# Altium PCB ir-kh.PcbDoc
Units mm, origin at the board's own origin, x right, y up, seen from the top; angles counter-clockwise.
Board outline 151 x 86.38 mm, 2 copper layers (Top Layer, Bottom Layer); 24 components, 19 nets, 66 pads, 0 vias.
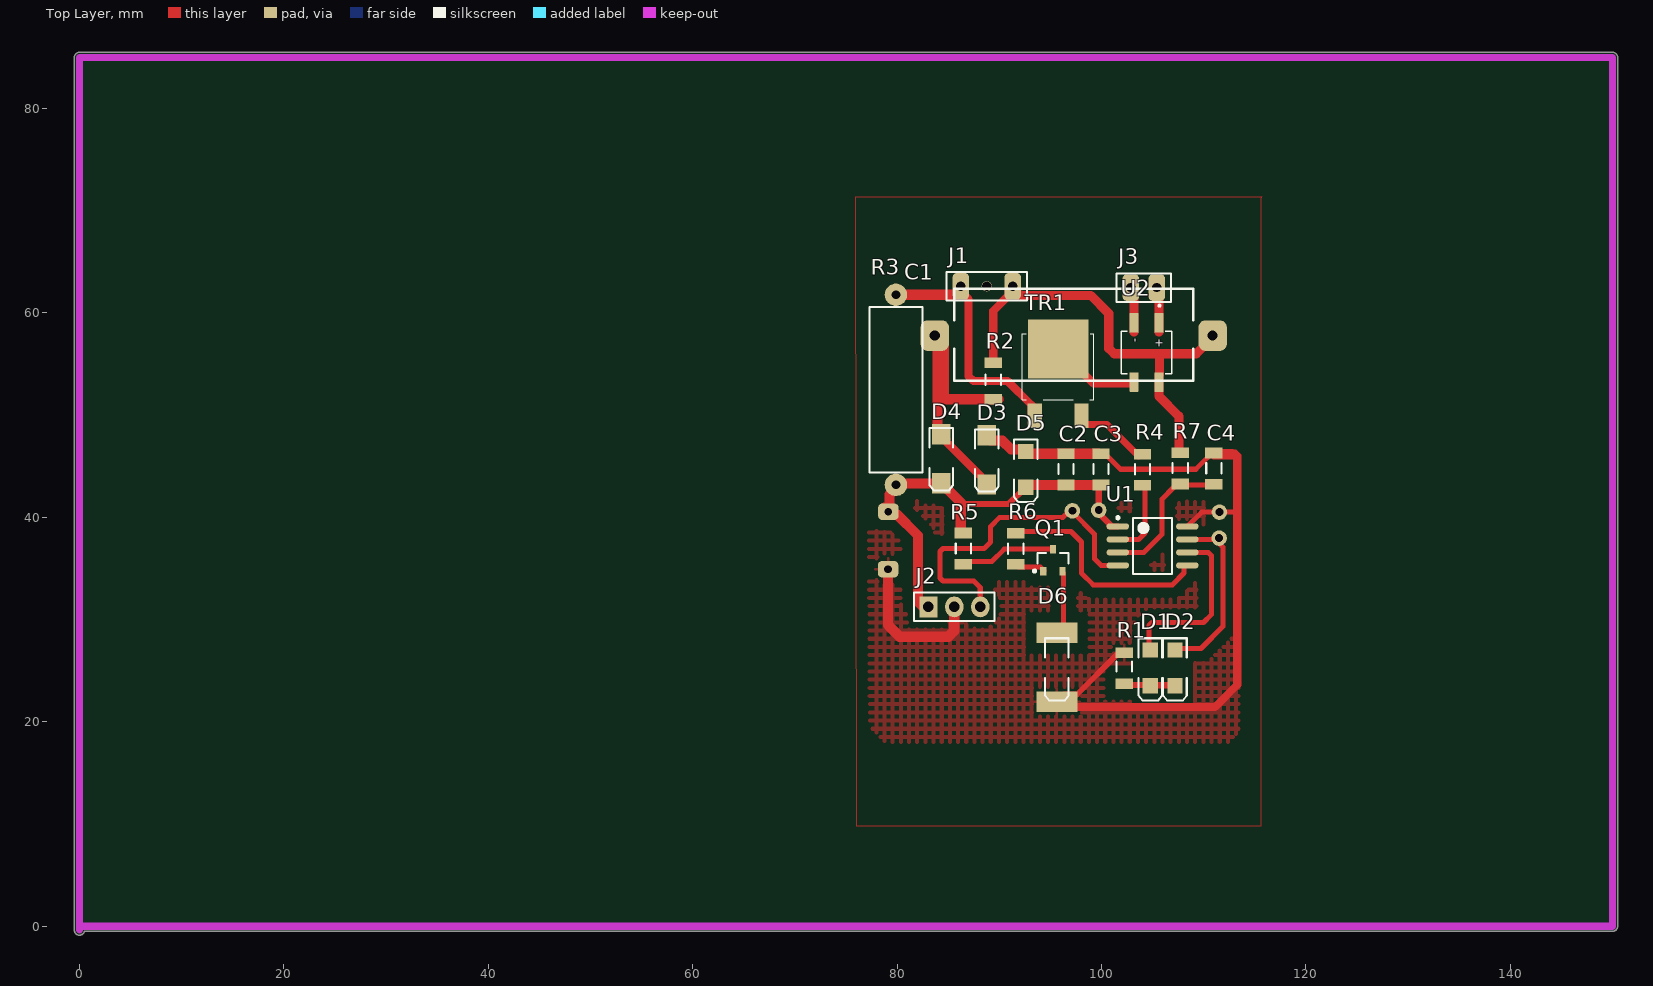
[diagram p0: Top Layer view]
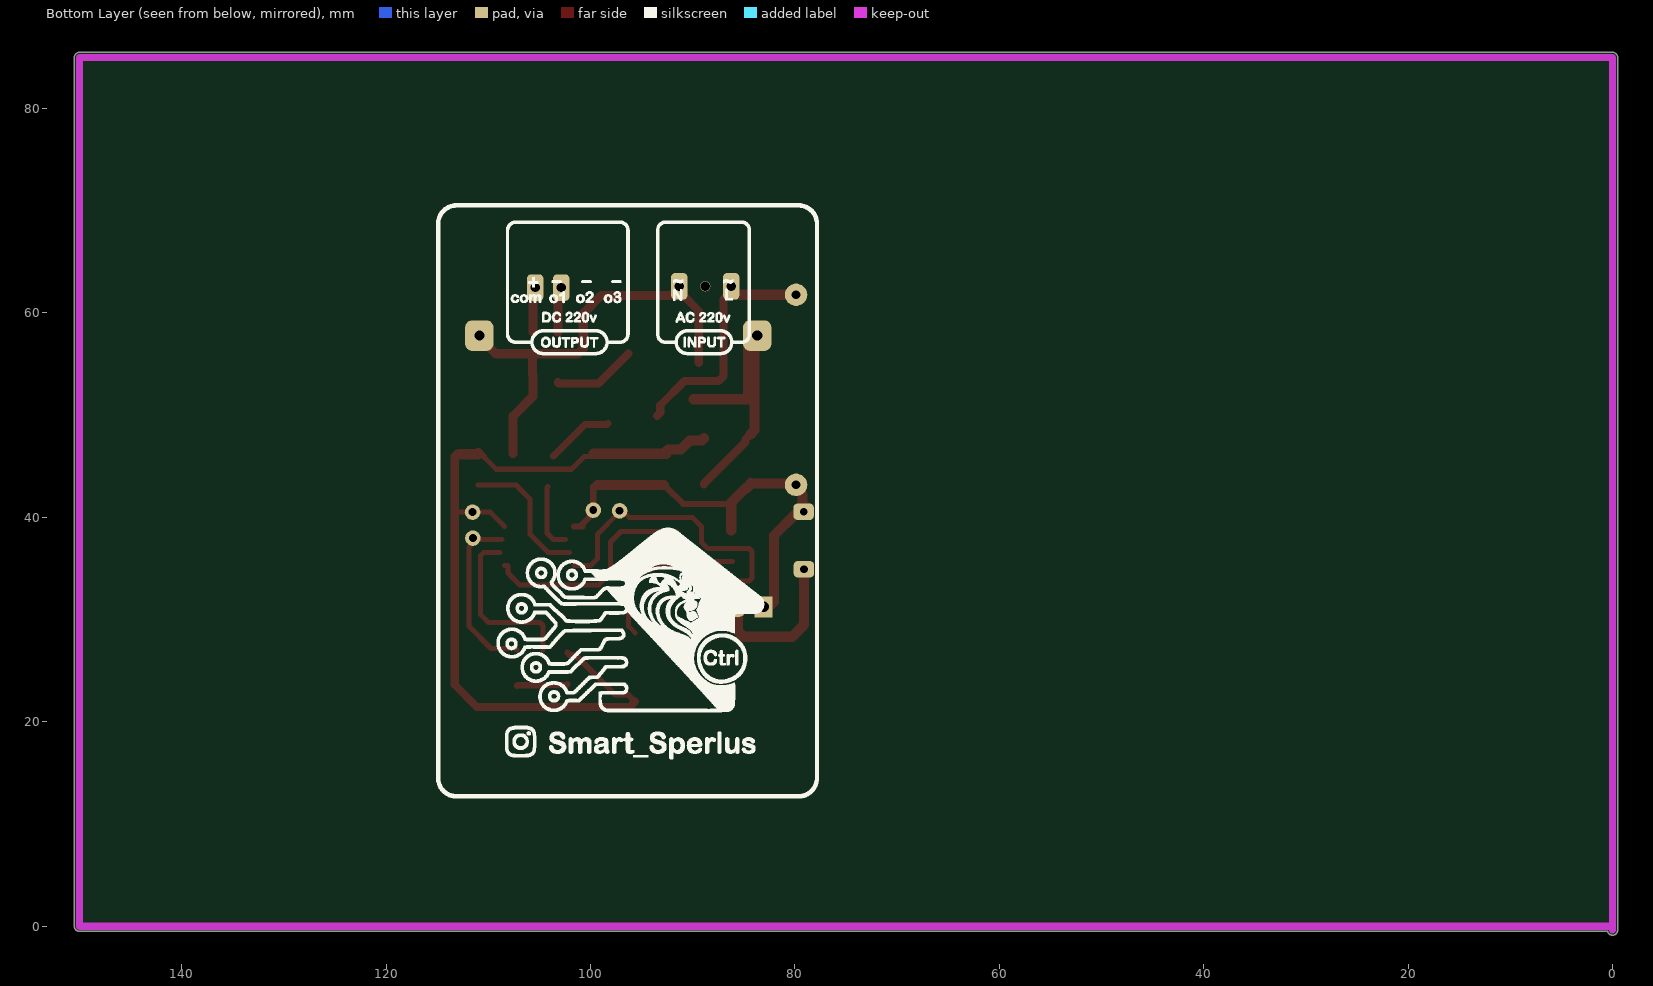
[diagram p1: Bottom Layer view, seen from below]
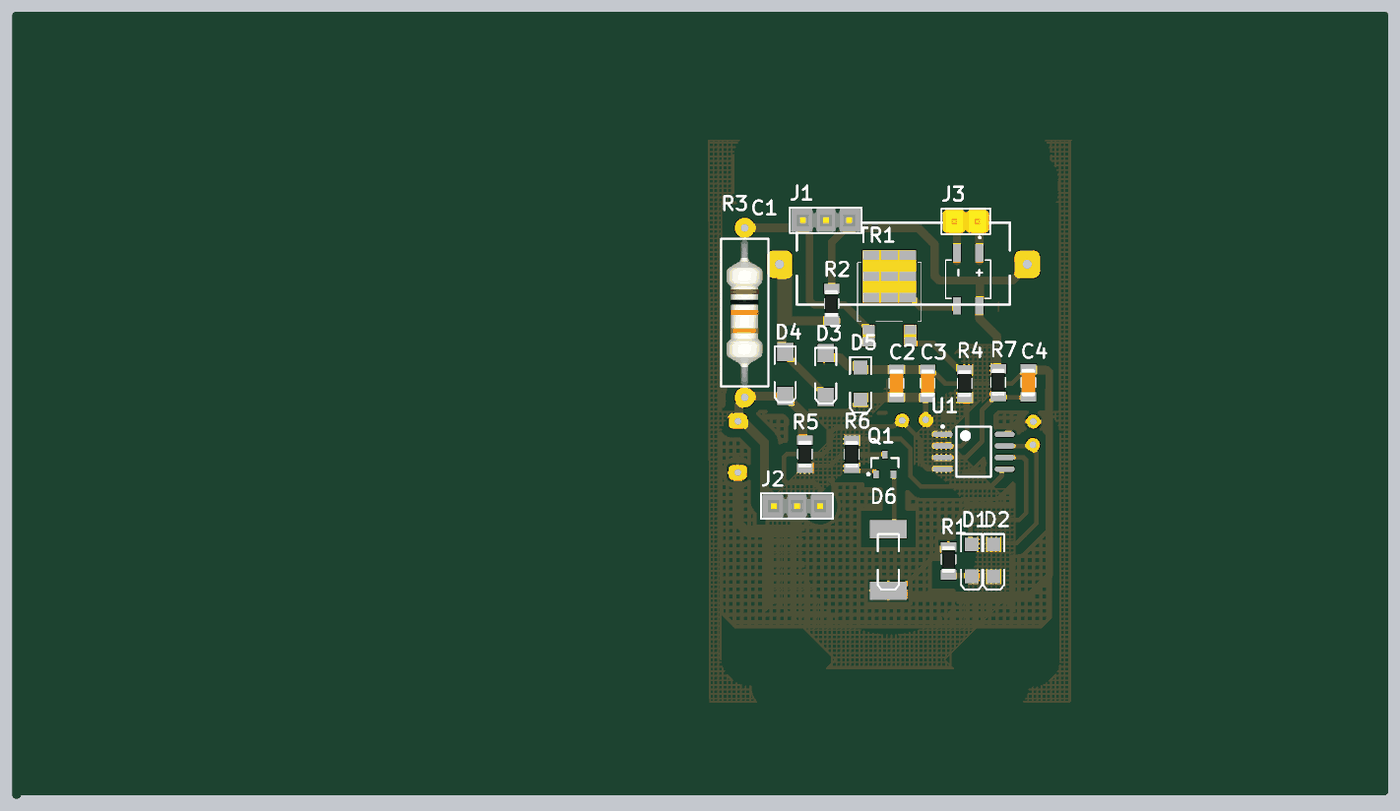
[diagram p2: 3D render of the assembled board from above, using the file's embedded part models]

## Layer stack, top to bottom
Top Solder: solder mask 0.0102, Solder Resist, Dk 3.5
Top Layer: signal copper 0.0356
Dielectric 1: dielectric 0.32, FR-4, Dk 4.8
Bottom Layer: signal copper 0.0356
Bottom Solder: solder mask 0.0102, Solder Resist, Dk 3.5

## Board outline
-0.5,-0.381 -0.5,85 cw(c0,85) 0,85.5 150,85.5 cw(c150,85) 150.5,85 150.5,0 cw(c150,0) 150,-0.5 0.486,-0.5 cw(c0,-0.381)

## Design rules (kind name [scope] priority, off if disabled: settings)
Clearance Clearance_1 [InPolygon] p1: gap=1 ignorepadtopadclearanceinfootprint=FALSE
Clearance [All] p2: gap=0.6 ignorepadtopadclearanceinfootprint=FALSE
PolygonConnect [All] p1: connectstyle=Relief reliefconductorwidth=0.254 reliefentries=4 polygonreliefangle="90 Angle" airgapwidth=0.254
RoomDefinition ir-kh [InComponentClass('ir-kh')] p1: confinementstyle=ConfineIn formatcopy=TRUE lockcomponents=FALSE outline 144.907,-4.953 247.904,-4.953 247.904,23.114 144.907,23.114
RoutingLayers [All] p1: top layer_v5=FALSE bottom layer_v5=TRUE
RoutingVias [All] p1: holewidth=0.711 width=2.5 viastyle="Through Hole" minholewidth=0.711 minwidth=1.27 maxholewidth=0.711 maxwidth=2
SolderMaskExpansion [All] p1: expansion=0.102 istentingtop=FALSE
Width [All] p1: maxlimit=3 minlimit=0.5 preferedwidth=1
29 further rules are at their usual default settings.

## Components (designator, comment, footprint, x,y, rotation, side; value= is the part's Value field where it differs from the comment)
C1 "1uf 400v" "1uf 400v" 109.601,62.357 r180 top value=1uF
C2 "=Value" "CAP 1206"#1 96.52,44.704 r90 top
C3 "=Value" "CAP 1206"#1 99.949,44.704 r90 top
C4 "=Value" "CAP 1206"#2 110.998,44.831 r270 top
D1 "LED2" 3.2X1.6X1.1#1 104.775,25.273 r270 top
D2 "LED2" 3.2X1.6X1.1#1 107.188,25.273 r270 top
D3 "D Tunnel1" 3.2X1.6X1.1#2 88.773,45.72 r270 top
D4 "D Tunnel1" 3.2X1.6X1.1#2 84.328,45.847 r270 top
D5 "D Tunnel1" 3.2X1.6X1.1#1 92.583,44.704 r270 top
D6 "LED2" 3.2X1.6X1.1#3 95.631,25.273 r270 top
J1 "Header3X1" "HEADER 3X1"#1 86.233,62.611 r0 top
J2 "Header3X1" "HEADER 3X1"#2 83.058,31.242 r0 top
J3 "Header2X1" "Header 2X1" 104.14,62.484 r0 top
Q1 "QNPN" SOT-23B_L 95.25,35.814 r90 top
R1 "10K" "RES 1206 (3216X08L)"#1 102.235,25.4 r90 top
R2 "10K" "RES 1206 (3216X08L)"#2 89.408,53.467 r270 top
R3 "10K" Res-(2/1) 79.883,61.78 r270 top
R4 "10K" "RES 1206 (3216X08L)"#3 104.013,44.704 r270 top
R5 "10K" "RES 1206 (3216X08L)"#4 86.487,36.957 r90 top
R6 "10K" "RES 1206 (3216X08L)"#4 91.622,36.921 r270 top
R7 "10K" "RES 1206 (3216X08L)"#3 107.696,44.831 r270 top
TR1 "BT136S-600D" SOT428 95.758,54.737 r0 top
U1 "ATtiny15L-1SC" 8S2_N 105,37.211 r0 top
U2 "MB6S" SOIC245P670X270-4N 104.394,56.134 r270 top

## Footprints (in the part's own frame and the unit in brackets; to place one, negate y for a bottom-side part, rotate by r counter-clockwise, add the part's x,y. Pads: shape width x height; smd on the part's side, far side on the other; paste and mask are expansions set on the pad)
"1uf 400v" [mm] "24*9mm"
  rrect50% 2.8x3 hole 1: 1(-1.27,4.572) 2(25.908,4.572)
  silkscreen extent 0.63,0 24,9
3.2X1.6X1.1#1 [mm] "SMT LED; 2 Flat Leads"
  rect 1.5x1.5 smd: 1(-1.75,0) 2(1.75,0)
  silkscreen extent -2.9,-1.15 3.2,1.15
3.2X1.6X1.1#2 [mm] "SMT LED; 2 Flat Leads"
  rect 2x1.8 smd: 1(-2.296,0) 2(2.504,0)
  silkscreen extent -2.9,-1.15 3.2,1.15
3.2X1.6X1.1#3 [mm] "SMT LED; 2 Flat Leads"
  rect 2x4 smd: 1(-3.429,0) 2(3.302,0)
  silkscreen extent -2.9,-1.15 3.2,1.15
8S2_N [mm] "SOP, 8-Leads, Body 5.3x5.3mm, Pitch 1.27mm, IPC Medium Density"
  oval 2.2x0.6 smd: 1(-3.4,1.905) 2(-3.4,0.635) 3(-3.4,-0.635) 4(-3.4,-1.905) 5(3.4,-1.905) 6(3.4,-0.635) 7(3.4,0.635) 8(3.4,1.905)
  silkscreen extent -3.52,-2.75 1.9,2.88, body extent -2.73,-2.75 2.73,2.75, height 2.16
"CAP 1206"#1 [mm]
  rect 1.05x1.7 smd: 1(-1.533,0) 2(1.517,0)
  silkscreen extent -0.47,-0.75 0.53,0.75, body extent -1.49,-0.77 1.55,0.75, height 0.75
"CAP 1206"#2 [mm]
  rect 1.05x1.7 smd: 1(-1.461,0) 2(1.589,0)
  silkscreen extent -0.47,-0.75 0.53,0.75, body extent -1.49,-0.77 1.55,0.75, height 0.75
"Header 2X1" [mm]
  rrect50% 1.6x2.6 hole 0.9: 1(-1.27,0) 2(1.27,0)
  silkscreen extent -2.67,-1.4 2.67,1.4, body extent -2.54,-1.27 2.54,1.27, height 9.5
"HEADER 3X1"#1 [mm]
  rrect50% 1.6x2.6 hole 0.9: 1(0,0) 3(5.08,0)
  round 1 hole 0.9: 2(2.54,0)
  silkscreen extent -1.4,-1.4 6.48,1.4, body extent -1.24,-1.27 6.38,1.27, height 8.38
"HEADER 3X1"#2 [mm]
  rect 1.778x2.032 hole 1.016: 1(0,0)
  oval 1.778x2.032 hole 1.016: 2(2.54,0) 3(5.08,0)
  silkscreen extent -1.4,-1.4 6.48,1.4, body extent -1.24,-1.27 6.38,1.27, height 8.38
"RES 1206 (3216X08L)"#1 [mm] "Chip Resistor, 2-Leads, Body 3.2x1.6mm, IPC High Density _ (0.125 W)"
  rect 1.05x1.7 smd: 1(-1.691,0) 2(1.359,0)
  silkscreen extent -0.5,-0.75 0.5,0.75, body extent -1.52,-0.76 1.53,0.76, height 0.6
"RES 1206 (3216X08L)"#2 [mm] "Chip Resistor, 2-Leads, Body 3.2x1.6mm, IPC High Density _ (0.125 W)"
  rect 1.05x1.7 smd: 1(-1.651,0) 2(1.905,0)
  silkscreen extent -0.5,-0.75 0.5,0.75, body extent -1.52,-0.76 1.53,0.76, height 0.6
"RES 1206 (3216X08L)"#3 [mm] "Chip Resistor, 2-Leads, Body 3.2x1.6mm, IPC High Density _ (0.125 W)"
  rect 1.05x1.7 smd: 1(-1.486,0) 2(1.564,0)
  silkscreen extent -0.5,-0.75 0.5,0.75, body extent -1.52,-0.76 1.53,0.76, height 0.6
"RES 1206 (3216X08L)"#4 [mm] "Chip Resistor, 2-Leads, Body 3.2x1.6mm, IPC High Density _ (0.125 W)"
  rect 1.05x1.7 smd: 1(-1.533,0) 2(1.517,0)
  silkscreen extent -0.5,-0.75 0.5,0.75, body extent -1.52,-0.76 1.53,0.76, height 0.6
Res-(2/1) [mm]
  round 2.2 hole 0.85: 1(0,0) 2(18.6,0)
  silkscreen extent 1.2,-2.6 17.4,2.6, body extent 1.28,-1.98 17.32,1.92, height 7.03
SOIC245P670X270-4N [mm]
  rrect23% 1.91x0.91 smd: 1(-2.9,1.225) 2(-2.9,-1.225) 3(2.9,-1.225) 4(2.9,1.225)
  silkscreen extent -4.68,-2.48 2.1,2.48
SOT428 [mm]
  rect 1.4x2.4 smd paste-2: 1(-2.285,-4.8) 3(2.285,-4.8)
  rect 5.9x5.75 smd paste-4: MB(0,1.725)
  silkscreen extent -3.5,-3.25 3.5,3.25
SOT-23B_L [mm] "SOT23, 3-Leads, Body 2.9x1.3mm, Pitch 0.95mm, Lead Span 2.4mm, IPC High Density"
  rect 0.85x0.6 smd: 1(-1.075,0.95) 2(-1.075,-0.95) 3(1.075,0)
  silkscreen extent -1.2,-1.5 0.7,1.92, body extent -0.7,-1.5 0.7,1.5, height 1.14

## Part data
C1: "Capacitor 24*9mm", ComponentLinkURL=www.picpars.com, Designer="Seyed Mohsen Ghasemain"
C2 C3 C4: library part Capacitor, "Capacitor"
D1 D2 D6: "Typical RED, GREEN, YELLOW, AMBER GaAs LED", LatestRevisionDate=17-Jul-2002, LatestRevisionNote="Re-released for DXP Platform.", PackageDescription="SM LED; 2 Flat Leads", PackageReference=3.2X1.6X1.1, PackageVersion=Feb-2002, Published=8-Jun-2000, Publisher="Altium Limited"
D3 D4 D5: "Tunnel Diode - RLC Model", LatestRevisionDate=17-Jul-2002, LatestRevisionNote="Re-released for DXP Platform.", PackageDescription="SM LED; 2 Flat Leads", PackageReference=3.2X1.6X1.1, PackageVersion=Feb-2002, Published=8-Jun-2000, Publisher="Altium Limited"
Q1: "NPN Bipolar Transistor", LatestRevisionDate=29-May-2009, LatestRevisionNote="IPC-7351 Footprint Added.", PackageDescription="3-Pin SOT-23 Package 0.95 mm Pitch, 2.4 mm Lead Span", PackageReference=SOT-23B, PackageVersion=Aug-1999, Published=8-Jun-2000, Publisher="Altium Limited"
R1 R2 R3 R4 R5 R6 R7: library part Resistor, "Resistor", Power="1/4 W", Tolerance=5%
TR1: "TRIAC 600V 27A 3-Pin(2+Tab) DPAK", Package=None, Check_prices=https://www.snapeda.com/parts/BT136S-600D/BitFenix+Co.+Ltd./view-part/?ref=eda, MF="WeEn Semiconductor(Hong Kong)Co.,Limited", MP=BT136S-600D, SnapEDA_Link=https://www.snapeda.com/parts/BT136S-600D/BitFenix+Co.+Ltd./view-part/?ref=snap
U1: "8-Bit AVR Microcontroller with 1K Byte of Flash Memory", Supplier Part Number 1=ATTINY15L-1SC-ND, ComponentLink1Description=Datasheet, ComponentLink1URL=http://www.atmel.com/dyn/resources/prod_documents/doc1187.pdf, ComponentLink2Description="Atmel.com Home", ComponentLink2URL=http://www.atmel.com, DatasheetVersion=1187E-AVR-06/02, LatestRevisionDate=16-Oct-2006, LatestRevisionNote="IPC-7351 Footprint Added.", PackageDescription="8-Lead, 0.208\" Body, Plastic Small Outline Package (EIAJ)", PackageReference=8S2, PackageVersion="revF, Apr-2008", Published=17-Sep-2003, Publisher="Altium Limited", Supplier 1=Digi-Key, Supplier 2=Mouser, Supplier Part Number 2=556-ATTINY15L1SC
U2: "Bridge Rectifier Single Phase Standard 600V Surface Mount 4-SOIC", Package="BESOP-4 Surge Components", Digi-Key_Part_Number=MB6SCT-ND, Digi-Key_Purchase_URL=https://www.digikey.com.tr/product-detail/en/on-semiconductor/MB6S/MB6SCT-ND/965654?utm_source=snapeda&utm_medium=aggregator&utm_campaign=symbol, MF="ON Semiconductor", MP=MB6S, SnapEDA_Link=https://www.snapeda.com/parts/MB6S/ON%20Semiconductor/view-part/2774209/?ref=snap

## Free pads (board coordinates)
  rrect50% 2x1.6 hole 0.762: 4(79.144,40.554) 5(79.121,34.925)
  round 1.524 hole 0.762: 6(111.541,40.513) 7(111.506,37.973) 8(99.725,40.714) 9(97.155,40.64)

## Nets (pads, with @x,y where several pads share a name; then routed paths per layer and width w, separated by ;. In a path a pad name is that pad's centre, name@x,y a point inside that pad or via, vN(x,y) a via of type N, cw(c..) or ccw(c..) an arc to the next point about the centre after c; other vN are vias at no path point)
GND: C2.2 C3.2 C4.1 D3.1 D5.1 D6.2 J2.2 pad.5 pad.6 R1.2 U1.8 | length 95.4
  Top Layer w0.5: C3.2@99.695,46.221 99.97,45.946 100.612,45.946 101.854,44.704 109.22,44.704 110.398,45.882 110.398,46.017 110.559,46.177 C4.1@110.986,46.177 ; U1.8 109.797,40.513 113.284,40.513
  Top Layer w0.6: D6.2 96.331,22.671 97.601,22.671 101.464,26.534 102.01,26.534 R1.2
  Top Layer w0.8: D6.2 96.139,21.463 111.125,21.463 113.284,23.622 113.284,40.513 113.284,46.007 113.063,46.228 ; 112.763,46.177 112.776,46.19
  Top Layer w1: pad.5 79.121,29.464 80.264,28.321 85.012,28.321 85.598,28.907 J2.2@85.598,30.404 ; D3.1@88.9,47.752 89.136,47.516 90.279,47.516 91.151,46.644 92.393,46.644 D5.1 ; D5.1@92.583,46.221 96.266,46.221 96.273,46.227 99.688,46.227 C3.2@99.695,46.221 ; C4.1@110.973,46.267 C4.1 ; C4.1@110.998,46.177 112.763,46.177
ir-r: J2.3 pad.9 U1.4 | length 32.2
  Top Layer w0.5: J2.3 88.138,33.147 87.503,33.782 84.494,33.782 84.201,34.075 84.201,36.664 84.494,36.957 88.519,36.957 89.154,37.592 89.154,39.116 90.043,40.005 96.223,40.005 96.858,40.64 pad.9 ; pad.9@97.224,40.444 99.314,38.354 99.314,35.941 99.949,35.306 U1.4
ir-t: R6.1 U1.5 | length 22
  Top Layer w0.5: R6.1@91.567,38.617 97.019,38.617 98.044,37.592 98.044,34.544 99.187,33.401 106.934,33.401 108.082,34.549 108.082,35.26 108.128,35.306 U1.5
l1: D2.1 pad.7 U1.7 | length 16.9
  Top Layer w0.5: D2.1 107.343,27.178 109.728,27.178 111.887,29.337 111.887,37.084 111.125,37.846 U1.7@108.683,37.846
l2: D1.1 U1.6 | length 16.7
  Top Layer w0.5: D1.1@104.648,27.023 104.648,29.425 104.941,29.718 109.982,29.718 110.744,30.48 110.744,36.283 110.451,36.576 U1.6@108.859,36.576
NetC1_2: C1.2 D3.2 D4.1 R2.2 | length 29.2
  Top Layer w0.8: D4.1 84.828,47.643 84.828,47.379 88.391,43.816 88.4,43.816 88.9,43.316 D3.2@88.9,43.216
  Top Layer w1: D4.1 83.947,48.524 83.947,58.166 84.582,57.531 84.582,51.562 R2.2@89.916,51.562
NetD1_2: D1.2 D2.2 R1.1 | length 7.6
  Top Layer w0.5: D1.2@104.648,23.523 D1.2 D2.2
  Top Layer w0.6: R1.1 102.328,23.616 107.095,23.616 D2.2
NetD6_1: D6.1 Q1.2 | length 6.3
  Top Layer w0.5: D6.1 96.266,29.337 96.266,34.548 96.2,34.614 Q1.2
NetJ3_1: J3.1 U2.2 | length 4.5
  Top Layer w0.9: J3.1 103.169,62.185 U2.2@103.169,58.145
NetJ3_2: J3.2 U2.1 | length 4.4
  Top Layer w0.9: J3.2 105.614,62.28 105.614,58.15 U2.1@105.619,58.145
NetQ1_1: Q1.3 R5.1 | length 9.6
  Top Layer w0.5: R5.1@86.106,35.678 89.272,35.678 90.483,36.889 Q1.3
NetQ1_2: Q1.1 R6.2 | length 3
  Top Layer w0.5: R6.2 91.897,35.129 94.035,35.129 94.35,34.814 Q1.1@94.35,34.739
NetR4_1: R4.1 TR1.3 | length 6.6
  Top Layer w0.7: TR1.3@98.296,49.184 98.393,49.087 100.544,49.087 R4.1@103.626,46.005
NetTR1_MB: TR1.MB U2.3 | length 8.2
  Top Layer w0.8: TR1.MB@96.266,56.029 99.209,53.086 103.114,53.086 103.169,53.141 U2.3
nol: C1.1 J1.3 R2.1 R7.1 U2.4 | length 43.7
  Top Layer w0.8: R2.1 89.408,60.198 90.913,61.703 90.913,61.711 91.005,61.803 J1.3@91.013,61.803
  Top Layer w0.9: J1.3@91.313,62.111 91.663,61.761 92.151,61.761 92.19,61.722 98.933,61.722 100.711,59.944 100.711,56.534 101.238,56.007 105.664,56.007 ; U2.4 105.624,53.239 105.624,53.951 105.664,53.991 105.664,56.007 ; U2.4@105.624,53.062 105.624,52.35 105.619,52.345 105.619,51.845 107.569,49.895 R7.1@107.569,46.242 ; C1.1@111.045,57.785 109.267,56.007 105.664,56.007
  Top Layer w1: J1.3@91.013,61.803 91.013,62.311 J1.3
out: R4.2 U1.2 | length 6.7
  Top Layer w0.5: U1.2@102.427,37.846 103.632,37.846 104.267,38.481 104.267,42.902 R4.2@104.177,42.992
vcc: C2.1 C3.1 D4.2 D5.2 J2.1 pad.4 pad.8 R3.2 R5.2 U1.1 | length 43.8
  Top Layer w0.5: D5.2 D5.2@92.8,43.171
  Top Layer w0.6: 86.233,41.316 90.945,41.316 D5.2 ; C3.1@99.695,43.044 99.725,43.014 99.725,41.021 99.725,40.406 100.8,39.331 100.8,39.116 U1.1
  Top Layer w1: pad.4@78.786,40.94 79.248,40.94 79.248,42.22 79.883,42.855 R3.2 ; pad.4 78.786,40.34 79.929,40.34 82.042,38.227 82.042,31.75 J2.1@82.55,31.242 ; R3.2@79.86,43.157 80.01,43.307 84.292,43.307 D4.2 84.328,43.243 84.728,42.843 84.828,42.843 86.355,41.316 ; R5.2@86.233,38.735 86.233,41.316 ; D5.2@92.8,43.171 C2.1 C3.1@99.314,43.171
vdd: J1.1 R3.1 TR1.1 | length 24.1
  Top Layer w0.8: J1.1@86.233,62.111 86.995,61.349 86.995,53.809 87.464,53.34 90.805,53.34 93.173,50.972 93.173,50.237 TR1.1
  Top Layer w1: R3.1 85.347,61.78 85.378,61.811 85.933,61.811 86.233,62.111 J1.1
zero: C4.2 R7.2 U1.3 | length 13.7
  Top Layer w0.5: U1.3@102.055,36.576 104.14,36.576 105.918,38.354 105.918,41.783 107.096,42.961 107.096,42.992 107.287,43.183 C4.2@110.998,43.183
pads on no net: J1.2

## Polygon pours and split planes (outlines as drawn)
GND on Top Layer "GND_L01_P025" (hatched 90Degree grid 0.8 track 0.4, pour order 25): 77.216,44.069 113.157,44.069 113.411,43.815 113.411,19.05 112.395,18.034 78.867,18.034 77.343,19.558
GND on Top Layer "NONET_L01_P024" (hatched 90Degree grid 0.5 track 0.2, shelved, pour order 24): 75.946,71.374 115.697,71.374 115.57,71.247 115.57,9.779 76.073,9.779

## Keep-outs
Keep-Out Layer:
  lines w0.7: 0,-0.381 0,85 150,85 150,0 0,0

## Silkscreen, mask and mechanical layers (free items; w line width, h text height)
Bottom Overlay:
  drawing of 14186 lines, arcs and shapes, not listed
Bottom Solder:
  lines w0.2: 76.454,17.018 76.454,67.31 115.062,67.31 115.062,17.018 76.454,17.018

## Text inside footprints (layer, text, board x,y; h text height)
U2: Top Overlay "-" at 102.994,57.534 h0.81 r270; Top Overlay "+" at 105.284,57.533 h0.81 r270